# EAGLE board fnordstripe (EAGLE 6.1)
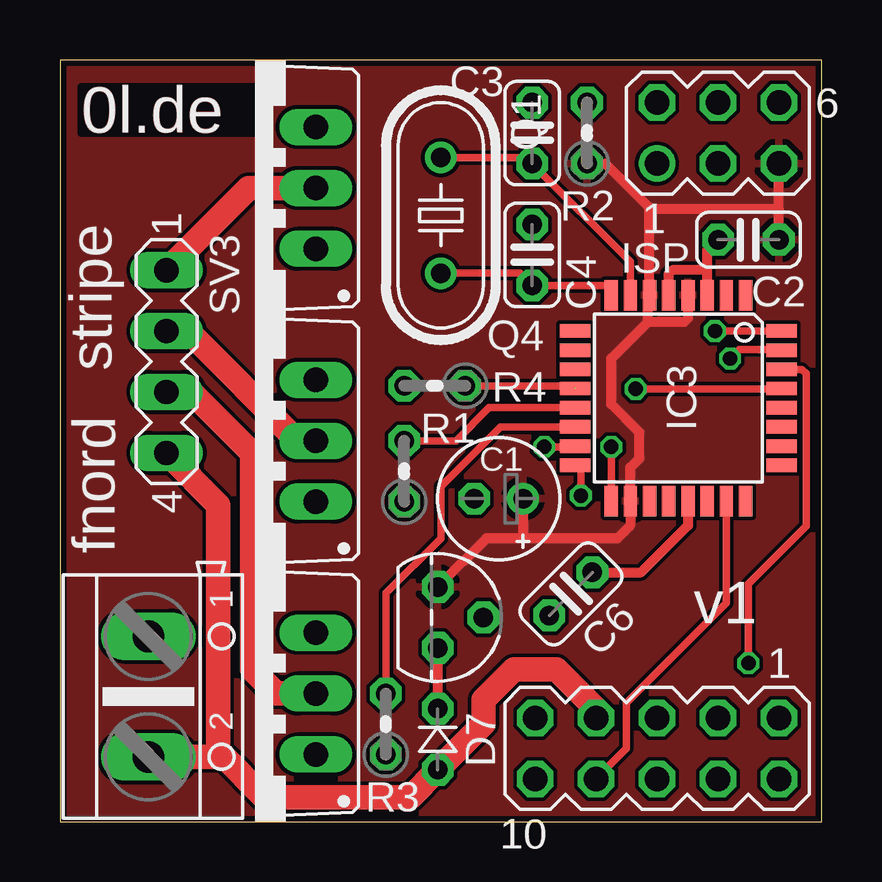
[diagram p0: board, top side]
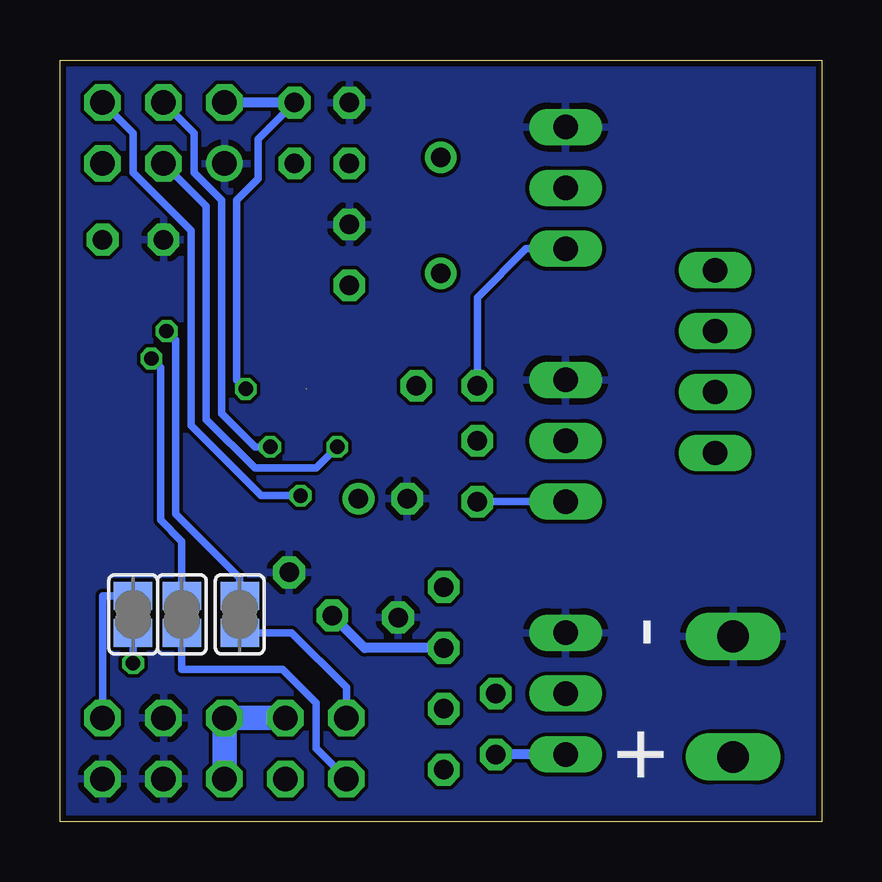
[diagram p1: board, bottom side, seen from below]

Size 31.75 x 31.75 mm. Coordinates in mm from the lower left corner, seen from the top.
Outline: 0,0 31.75,0 31.75,31.75 0,31.75 0,0
Copper layers (1*16): Top 0.035mm / dielectric 1.5mm / Bottom 0.035mm
Design rules: minimum track width 6mil, minimum drill 12mil, track to track 6mil, track to pad 6mil, pad to pad 6mil, via to via 6mil, smd to smd 0mil, copper to edge 10mil, drill to drill 10mil, minimum pad ring 10mil, minimum via ring 6mil, stop-mask expansion 2mil, vias tented up to drill 100mil, thermal gap 10mil

## Footprints (pad centres in the part's own frame; a part is rotated, then mirrored left to right if it is on the bottom)
MA05-2 = drill 1.016 octagon: 1 -5.08,-1.27; 2 -5.08,1.27; 3 -2.54,-1.27; 4 -2.54,1.27; 5 0,-1.27; 6 0,1.27; 7 2.54,-1.27; 8 2.54,1.27; 9 5.08,-1.27; 10 5.08,1.27
E2-5 = drill 0.813 pad 1.27: + -1.016,0 | drill 0.813 pad 1.27 octagon: - 1.016,0
C025-024X044 = drill 0.813 octagon: 1 -1.27,0; 2 1.27,0
D-2.5 = drill 0.813 octagon: A 1.27,0; C -1.27,0
TO92 = drill 0.813 octagon: 1 -1.27,0; 2 0,1.905; 3 1.27,0
TQFP32-08 = smd 1.27 x 0.559: 1 -4.293,2.8; 2 -4.293,2; 3 -4.293,1.2; 4 -4.293,0.4; 5 -4.293,-0.4; 6 -4.293,-1.2; 7 -4.293,-2; 8 -4.293,-2.8; 17 4.293,-2.8; 18 4.293,-2; 19 4.293,-1.2; 20 4.293,-0.4; 21 4.293,0.4; 22 4.293,1.2; 23 4.293,2; 24 4.293,2.8 | smd 0.559 x 1.27: 9 -2.8,-4.293; 10 -2,-4.293; 11 -1.2,-4.293; 12 -0.4,-4.293; 13 0.4,-4.293; 14 1.2,-4.293; 15 2,-4.293; 16 2.8,-4.293; 25 2.8,4.293; 26 2,4.293; 27 1.2,4.293; 28 0.4,4.293; 29 -0.4,4.293; 30 -1.2,4.293; 31 -2,4.293; 32 -2.8,4.293
MA03-2 = drill 1.016: 1 -2.54,-1.27 | drill 1.016 octagon: 2 -2.54,1.27; 3 0,-1.27; 4 0,1.27; 5 2.54,-1.27; 6 2.54,1.27
HC49U-V = drill 0.813: 1 -2.413,0; 2 2.413,0
TO220BV = drill 1.016 long: D 0,-2.54; G -2.54,-2.54; S 2.54,-2.54
0204V = drill 0.813 octagon: 1 -1.27,0; 2 1.27,0
SJ = smd 1.168 x 1.6: 1 -0.762,0; 2 0.762,0
MA04-1 = drill 1.016 long: 1 -3.81,0; 2 -1.27,0; 3 1.27,0; 4 3.81,0
AK500/2 = drill 1.321 long: 1 -2.515,0; 2 2.515,0

## Placement (x,y rotation side)
BUS  [MA05-2]  24.89,3.05 180 top
C1  47uF  [E2-5]  18.29,13.46 180 top
C2  100n  [C025-024X044]  28.7,24.26 180 top
C3  33p  [C025-024X044]  19.68,28.7 90 top
C4  33p  [C025-024X044]  19.68,23.62 90 top
C6  100n  [C025-024X044]  21.3,9.49 45 top
D7  [D-2.5]  15.75,3.43 270 top
IC2  78L05Z  [TO92]  15.75,8.51 270 top
IC3  MEGA8-AI  [TQFP32-08]  25.78,17.65 270 top
ISP  [MA03-2]  27.43,28.7 0 top
Q1  16MHz  [HC49U-V]  15.88,25.27 270 top
Q2  IRF540  [TO220BV]  8.13,15.88 90 top
Q3  IRF540  [TO220BV]  8.13,5.33 90 top
Q4  IRF540  [TO220BV]  8.13,26.42 90 top
R1  50  [0204V]  14.35,14.61 90 top
R2  2k2  [0204V]  21.97,28.7 90 top
R3  50  [0204V]  13.59,4.06 90 top
R4  50  [0204V]  15.62,18.16 180 top
SJ1  [SJ]  28.7,8.64 90 bottom
SJ2  [SJ]  26.67,8.64 270 bottom
SJ3  [SJ]  24.26,8.64 270 bottom
SV3  [MA04-1]  4.45,19.18 270 top
X1  [AK500/2]  3.68,5.21 270 top

## Library data of the parts
BUS = con-lstb
C1-C4 C6 R1-R4 = rcl
D7 = diode
IC2 = linear
IC3 = atmel; MPN: ATMEGA8-16AU; OC_FARNELL: 9171371; OC_NEWARK: 73M8863
ISP SV3 = con-lstb; OC_FARNELL: unknown; OC_NEWARK: unknown
Q1 = crystal
Q2-Q4 = transistor-power
SJ1-SJ3 = jumper
X1 = con-ptr500; OC_FARNELL: unknown; OC_NEWARK: unknown

## Nets
+5V: C1.+ C2.1 IC2.1 IC3.4 IC3.6 IC3.18 ISP.5 R2.1
+12V: BUS.5 BUS.6 BUS.7 D7.A SV3.4 X1.2
ADC0: BUS.8 IC3.23
BLUE: IC3.14 R3.2
BLUE2: IC3.11
BUSINT: BUS.9 SJ3.2
CE: IC3.19
CSN: IC3.22
DATA1: BUS.10 SJ2.2
DATA2: BUS.1 SJ1.2
GND: BUS.2 BUS.3 BUS.4 C1.- C2.2 C3.2 C4.2 C6.2 IC2.2 IC3.3 IC3.5 IC3.21 ISP.1 Q2.S Q3.S Q4.S X1.1
GREEN: IC3.13 R1.2
GREEN2: IC3.10
INT0: IC3.32 SJ3.1
IRQ: IC3.1
MISO: IC3.16 ISP.6
MOSI: IC3.15 ISP.3
N$4: Q2.G R1.1
N$5: Q3.G R3.1
N$6: Q3.D SV3.3
N$7: Q4.G R4.2
N$8: Q2.D SV3.2
N$9: Q4.D SV3.1
N$22: C6.1 D7.C IC2.3
RED: IC3.12 R4.1
RED2: IC3.9
RST: IC3.29 ISP.2 R2.2
RX: IC3.30 SJ1.1
SCK: IC3.17 ISP.4
TX: IC3.31 SJ2.1
XTAL1: C3.1 IC3.7 Q1.1
XTAL2: C4.1 IC3.8 Q1.2

## Tracks (layer width: path | path; a pad name or v marks a point on that pad's centre or on a via)
+5V
  Top 0.305: 24.51,21.88 IC3.6 | 24.65,25.53 24.58,25.6
  Top 0.406: IC3.4 26.18,20.97 26.04,20.83 24.51,20.83 | 24.51,20.83 22.99,19.3 22.99,17.4 24.16,16.22 24.16,15.14 23.78,14.76 IC3.18 23.78,12.35 23.24,11.81 19.3,11.81 | 24.51,20.83 24.51,21.88 | 29.97,25.53 ISP.5 | IC3.6 24.58,25.6 22.75,27.43 R2.1 | C2.1 29.97,25.53 | 29.97,25.53 24.65,25.53 | 19.3,11.81 17.78,11.81 IC2.1 | C1.+ 19.3,11.81
  pour Top: 0.25,31.5 31.5,31.5 31.5,0.25 0.25,0.25
+12V
  Top 1.016: BUS.7 22.35,4.7 20.7,6.35 18.92,6.35 17.65,5.08 17.65,4.06 D7.A 14.61,1.02 8.51,1.02 6.73,2.79 | 6.73,2.79 6.6,2.92 6.6,13.21 SV3.4 | X1.2 6.63,2.69 6.73,2.79
  Bottom 1.016: BUS.6 BUS.5 BUS.7
ADC0
  Top 0.305: IC3.23 27.78,9.11 23.62,4.95 23.62,3.05 BUS.8
BLUE
  Top 0.305: IC3.14 18.36,16.45 15.88,13.97 15.88,11.81 13.59,9.53 R3.2
BUSINT
  Bottom 0.305: SJ3.2 22.1,7.87 19.81,5.59 BUS.9
DATA1
  Bottom 0.305: BUS.10 21.08,3.05 21.08,4.95 22.48,6.35 26.67,6.35 SJ2.2
DATA2
  Bottom 0.305: BUS.1 29.97,9.4 SJ1.2
GND
  Top 0.406: IC3.21 26.18,12.34 24.23,10.39 C6.2 | IC3.5 25.38,22.84 25.53,22.99 26.98,22.99 | IC3.3 26.98,22.99 | 26.98,22.99 26.98,23.81 C2.2
  pour Bottom: 0.25,31.5 31.5,31.5 31.5,0.25 0.25,0.25
GREEN
  Top 0.305: R1.2 16.51,15.88 17.89,17.25 IC3.13
INT0  (via drill 0.6)
  Top 0.305: v27.3,20.45 IC3.32
  Bottom 0.305: SJ3.1 24.26,10.16 26.92,12.83 26.92,20.07 v27.3,20.45
MISO  (via drill 0.6)
  Top 0.305: IC3.16 21.72,14.62 v21.72,13.59
  Bottom 0.305: v21.72,13.59 23.37,13.59 26.29,16.51 26.29,24.64 28.7,27.05 28.7,28.7 ISP.6
MOSI  (via drill 0.6)
  Top 0.305: IC3.15 21.46,15.62 v20.19,15.62
  Bottom 0.305: ISP.3 25.65,25.65 25.65,16.76 23.62,14.73 21.08,14.73 v20.19,15.62
N$4
  Bottom 0.305: Q2.G R1.1
N$5
  Bottom 0.406: Q3.G R3.1
N$6
  Top 1.016: Q3.D 9.02,5.33 8,6.35 8,15.37 5.46,17.91 SV3.3
N$7
  Bottom 0.305: Q4.G 12.32,23.88 14.35,21.84 R4.2
N$8
  Top 1.016: Q2.D 9.91,15.88 5.33,20.45 SV3.2
N$9
  Top 1.016: Q4.D 7.87,26.42 SV3.1
N$22
  Top 0.406: IC2.3 D7.C
  Bottom 0.406: IC2.3 19.05,7.24 C6.1
RED  (1 unrouted)
  Top 0.305: 21.46,18.05 21.46,18.16 | 21.47,18.03 IC3.12 21.38,18.16 R4.1
RST  (via drill 0.6)
  Top 0.305: v24,18.03 30.05,18.03 IC3.29
  Bottom 0.305: R2.2 23.5,28.45 23.5,26.8 24.38,25.91 24.38,18.41 v24,18.03
  Bottom 0.406: R2.2 ISP.2
RX  (via drill 0.6)
  Top 0.305: IC3.30 30.93,18.85 31.11,18.67 31.11,12.32 28.7,9.91 v28.7,6.6
  Bottom 0.305: SJ1.1 v28.7,6.6
SCK  (via drill 0.6)
  Top 0.305: 22.96,13.34 IC3.17 v22.99,15.62
  Bottom 0.305: ISP.4 26.16,28.7 26.16,27.05 25.02,25.91 25.02,17.02 23.62,15.62 v22.99,15.62
TX  (via drill 0.6)
  Top 0.305: v27.94,19.3 28.32,19.68 30.04,19.68 IC3.31
  Bottom 0.305: v27.94,19.3 27.56,18.92 27.56,12.57 26.67,11.68 SJ2.1
XTAL1
  Top 0.305: IC3.7 23.78,23.34 C3.1 19.43,27.69 Q1.1
XTAL2
  Top 0.305: IC3.8 22.98,22.35 22.99,22.35 C4.1 19.18,22.86 Q1.2

## Text on the board
Top: 0l.de
tPlace: 0l.de | stripe | fnord | v1
bPlace: + -